# EAGLE board board (EAGLE 8.1.0)
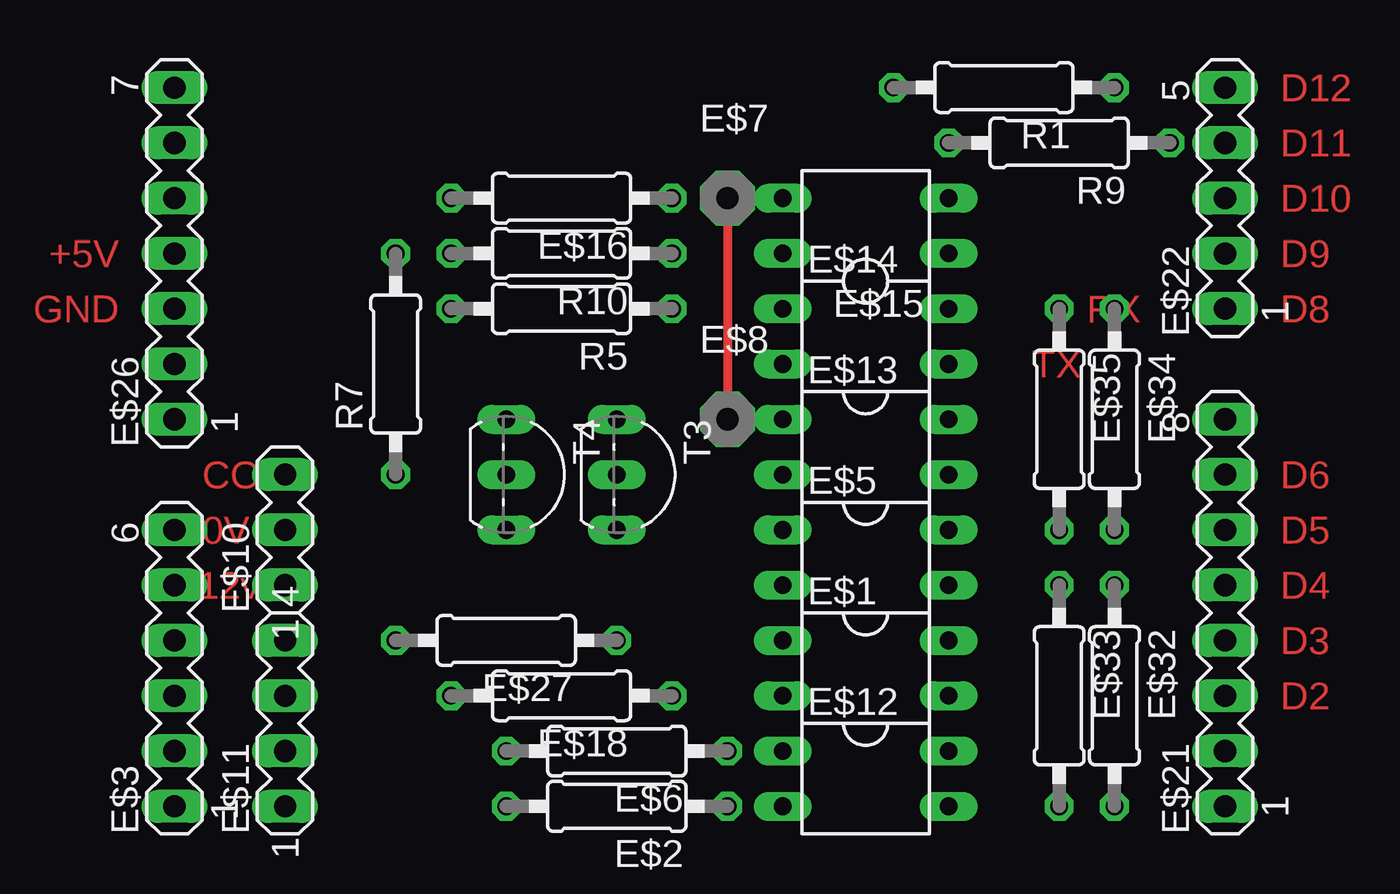
[diagram p0: board, top side]
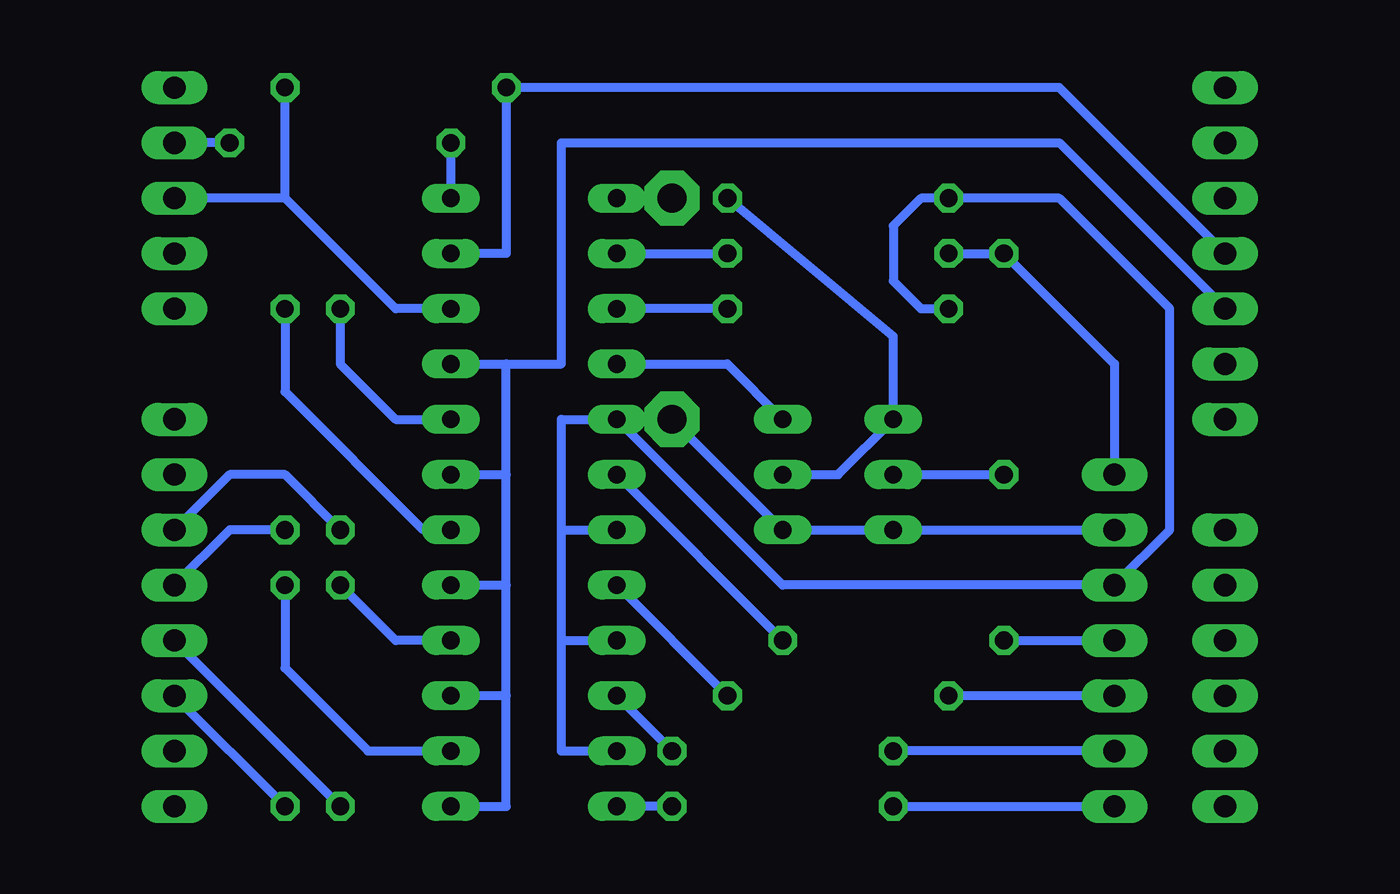
[diagram p1: board, bottom side, seen from below]

No outline drawn. Coordinates in mm, seen from the top.
Copper layers (1*16): Top 0.035mm / dielectric 1.5mm / Bottom 0.035mm
Design rules "default": minimum track width 10mil, minimum drill 24mil, track to track 8mil, track to pad 8mil, pad to pad 8mil, via to via 8mil, smd to smd 8mil, copper to edge 40mil, drill to drill 8mil, minimum pad ring 10mil, minimum via ring 8mil, stop-mask expansion 4mil, vias tented up to drill 0mil, thermal gap 10mil

## Footprints (pad centres in the part's own frame; a part is rotated, then mirrored left to right if it is on the bottom)
DIL04 = drill 0.813 long: 1 -1.27,-3.81; 2 1.27,-3.81; 3 1.27,3.81; 4 -1.27,3.81
0207/10 = drill 0.813 octagon: 1 -5.08,0; 2 5.08,0
MA06-1 = drill 1.016 long: 1 -6.35,0; 2 -3.81,0; 3 -1.27,0; 4 1.27,0; 5 3.81,0; 6 6.35,0
PAD-01 = drill 1.321 pad 2.54 octagon: 1 0,0
MA03-1 = drill 1.016 long: 1 -2.54,0; 2 0,0; 3 2.54,0
MA04-1 = drill 1.016 long: 1 -3.81,0; 2 -1.27,0; 3 1.27,0; 4 3.81,0
MA08-1 = drill 1.016 long: 1 -8.89,0; 2 -6.35,0; 3 -3.81,0; 4 -1.27,0; 5 1.27,0; 6 3.81,0; 7 6.35,0; 8 8.89,0
MA05-1 = drill 1.016 long: 1 -5.08,0; 2 -2.54,0; 3 0,0; 4 2.54,0; 5 5.08,0
MA07-1 = drill 1.016 long: 1 -7.62,0; 2 -5.08,0; 3 -2.54,0; 4 0,0; 5 2.54,0; 6 5.08,0; 7 7.62,0
TO92-CBE = drill 0.813 long: B 0,0; C -2.54,0; E 2.54,0

## Placement (x,y rotation side)
E$1  [DIL04]  72.39,41.91 270 top
E$2  2k2  [0207/10]  60.96,35.56 180 top
E$3  [MA06-1]  40.64,41.91 90 top
E$5  [DIL04]  72.39,46.99 270 top
E$6  2k2  [0207/10]  60.96,38.1 180 top
E$7  [PAD-01]  66.04,63.5 0 top
E$8  [PAD-01]  66.04,53.34 0 top
E$10  [MA03-1]  45.72,48.26 90 top
E$11  [MA04-1]  45.72,39.37 90 top
E$12  [DIL04]  72.39,36.83 270 top
E$13  [DIL04]  72.39,52.07 270 top
E$14  [DIL04]  72.39,57.15 270 top
E$15  [DIL04]  72.39,62.23 90 top
E$16  100k  [0207/10]  58.42,63.5 180 top
E$18  2k2  [0207/10]  58.42,40.64 180 top
E$21  [MA08-1]  88.9,44.45 90 top
E$22  [MA05-1]  88.9,63.5 90 top
E$26  [MA07-1]  40.64,60.96 90 top
E$27  2k2  [0207/10]  55.88,43.18 180 top
E$32  820  [0207/10]  83.82,40.64 270 top
E$33  820  [0207/10]  81.28,40.64 270 top
E$34  820  [0207/10]  83.82,53.34 270 top
E$35  820  [0207/10]  81.28,53.34 270 top
R1  4k7  [0207/10]  78.74,68.58 180 top
R5  1k2  [0207/10]  58.42,58.42 180 top
R7  47k  [0207/10]  50.8,55.88 90 top
R9  390  [0207/10]  81.28,66.04 180 top
R10  220  [0207/10]  58.42,60.96 180 top
T3  [TO92-CBE]  60.96,50.8 270 top
T4  [TO92-CBE]  55.88,50.8 270 top

## Library data of the parts
E$1 E$5 E$12-E$15 = ic-package
E$2 E$6 E$16 E$18 E$27 E$32-E$35 R1 R5 R7 R9 R10 = resistor
E$3 E$10 E$11 E$21 E$22 E$26 = con-lstb
E$7 E$8 = discrete
T3 T4 = transistor-neu-to92

## Nets
S$3: R10.1
S$4: R9.2
S$6: R7.1 T4.B
S$7: E$26.4
S$8: E$27.1
S$9: E$2.1
S$10: E$21.3 E$32.2
S$11: R7.2 R10.2
S$12: E$22.4 R9.1
S$13: E$22.3 R1.1
S$14: E$6.1
S$15: E$16.1 T3.B T4.C
S$16: E$21.4 E$33.2
S$17: E$32.1
S$18: E$33.1
S$19: E$21.5 E$34.2
S$20: E$14.2 T3.C
S$21: E$21.6 E$35.2
S$22: E$18.1
S$23: E$34.1
S$24: E$35.1
S$25: E$2.2
S$26: E$6.2
S$28: E$10.2 T3.E T4.E
S$31: E$18.2
S$32: E$27.2
S$40: E$26.3
S$55: E$10.1 E$16.2 R5.2

## Tracks (layer width: path | path; a pad name or v marks a point on that pad's centre or on a via)
S$1
  Bottom 0.406: 66.04,63.5 68.58,63.5
S$3
  Bottom 0.406: 68.58,60.96 R10.1
S$4
  Bottom 0.406: 76.2,63.5 R9.2
S$5
  Bottom 0.406: 63.5,58.42 68.58,58.42
S$6
  Bottom 0.406: T4.B R7.1
S$7
  Bottom 0.406: E$26.4 48.26,68.58 73.66,68.58 73.66,60.96 76.2,60.96
S$8
  Bottom 0.406: E$27.1 68.58,50.8
S$9
  Bottom 0.406: E$2.1 68.58,35.56
S$10
  Bottom 0.406: E$32.2 E$21.3
S$11
  Bottom 0.406: R10.2 R7.2 45.72,55.88 45.72,50.8
S$12
  Bottom 0.406: R9.1 E$22.4
S$13
  Bottom 0.406: 76.2,58.42 78.74,58.42 83.82,63.5 | 83.82,63.5 R1.1 | 83.82,63.5 E$22.3
S$14
  Bottom 0.406: E$6.1 68.58,40.64
S$15
  Bottom 0.406: T3.B 58.42,50.8 T4.C 55.88,57.15 E$16.1
S$16
  Bottom 0.406: E$33.2 E$21.4
S$17
  Bottom 0.406: E$32.1 83.82,41.91 80.01,38.1 76.2,38.1
S$18
  Bottom 0.406: 76.2,43.18 78.74,43.18 E$33.1
S$19
  Bottom 0.406: E$34.2 86.36,48.26 E$21.5
S$20
  Bottom 0.406: E$14.2 63.5,55.88 T3.C
S$21
  Bottom 0.406: E$35.2 83.82,50.8 86.36,50.8 E$21.6
S$22
  Bottom 0.406: E$18.1 68.58,45.72
S$23
  Bottom 0.406: E$34.1 83.82,54.61 77.47,48.26 76.2,48.26
S$24
  Bottom 0.406: E$35.1 81.28,55.88 78.74,53.34 76.2,53.34
S$25
  Bottom 0.406: E$2.2 45.72,35.56
S$26
  Bottom 0.406: 45.72,38.1 E$6.2
S$28
  Bottom 0.406: 66.04,53.34 T3.E T4.E E$10.2
S$31
  Bottom 0.406: 45.72,40.64 E$18.2
S$32
  Bottom 0.406: E$27.2 45.72,43.18
S$40
  Bottom 0.406: 76.2,50.8 73.66,50.8 | 73.66,50.8 73.66,45.72 76.2,45.72 | 76.2,55.88 73.66,55.88 | 73.66,55.88 71.12,55.88 71.12,66.04 48.26,66.04 E$26.3 | 73.66,50.8 73.66,55.88
S$41
  Bottom 0.406: 73.66,40.64 73.66,45.72 | 76.2,35.56 73.66,35.56 73.66,40.64 | 73.66,40.64 76.2,40.64
S$55
  Bottom 0.406: 71.12,43.18 71.12,38.1 68.58,38.1 | 71.12,43.18 71.12,48.26 | 71.12,43.18 68.58,43.18 | 71.12,48.26 68.58,48.26 | 71.12,48.26 71.12,53.34 68.58,53.34 60.96,45.72 E$10.1 43.18,48.26 43.18,58.42 48.26,63.5 E$16.2 54.61,63.5 55.88,62.23 55.88,59.69 54.61,58.42 R5.2
S$58
  Top 0.406: 66.04,63.5 66.04,53.34

## Text on the board
Top: D12 | D11 | D10 | +5V | D9 | GND | RX | D8 | TX | COM | D6 | 0V | D5 | +12v | D4 | D3 | D2